# Altium PCB Analog.PcbDoc
Units mm, origin at the board's own origin, x right, y up, seen from the top; angles counter-clockwise.
Board outline 30 x 20 mm, 2 copper layers (Top Layer, Bottom Layer), stack 1.036 mm thick; 48 components, 25 nets, 118 pads, 51 vias.
Unrouted connection lines stored in the file: 1.
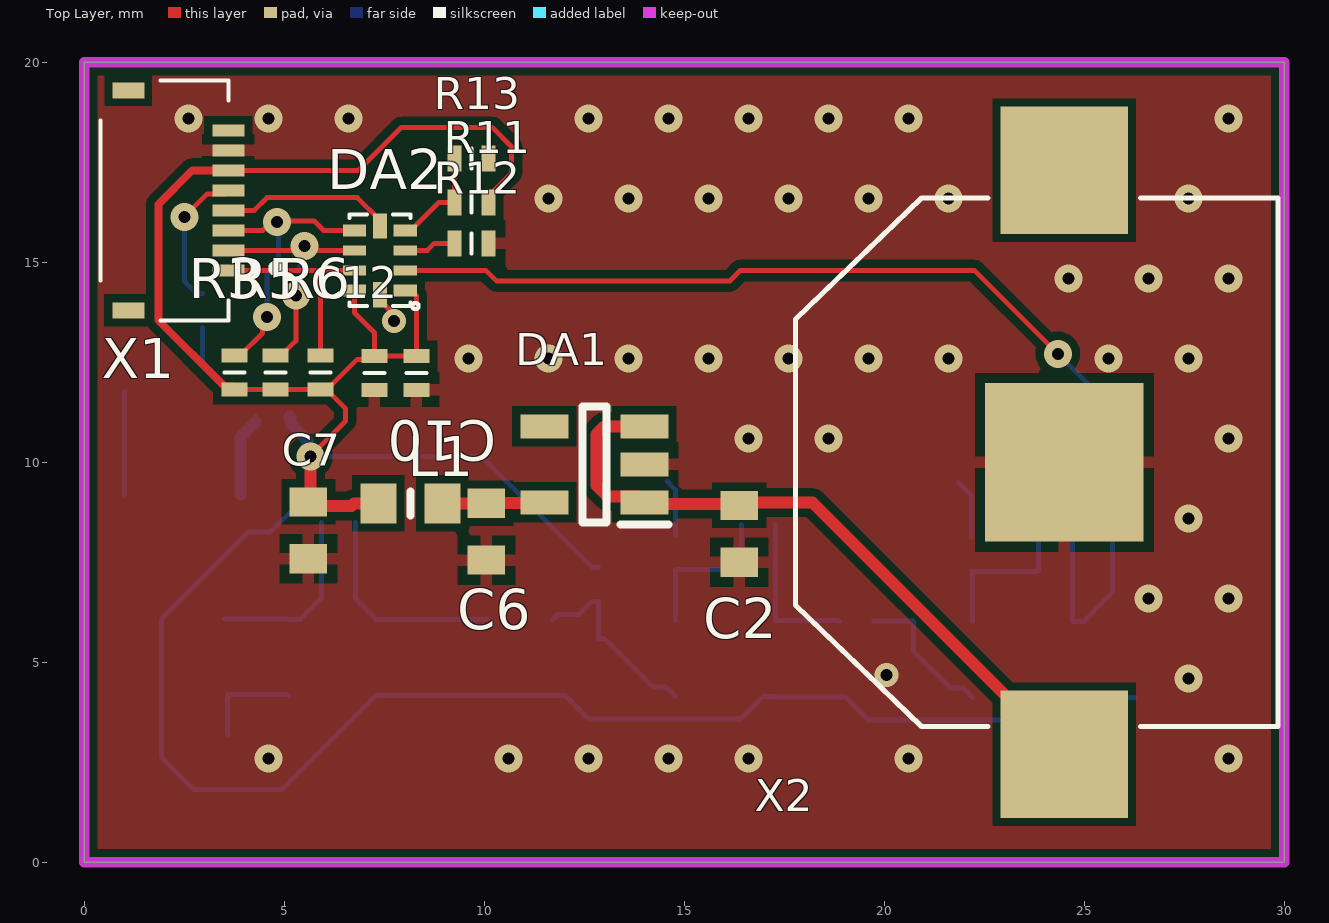
[diagram p0: Top Layer view]
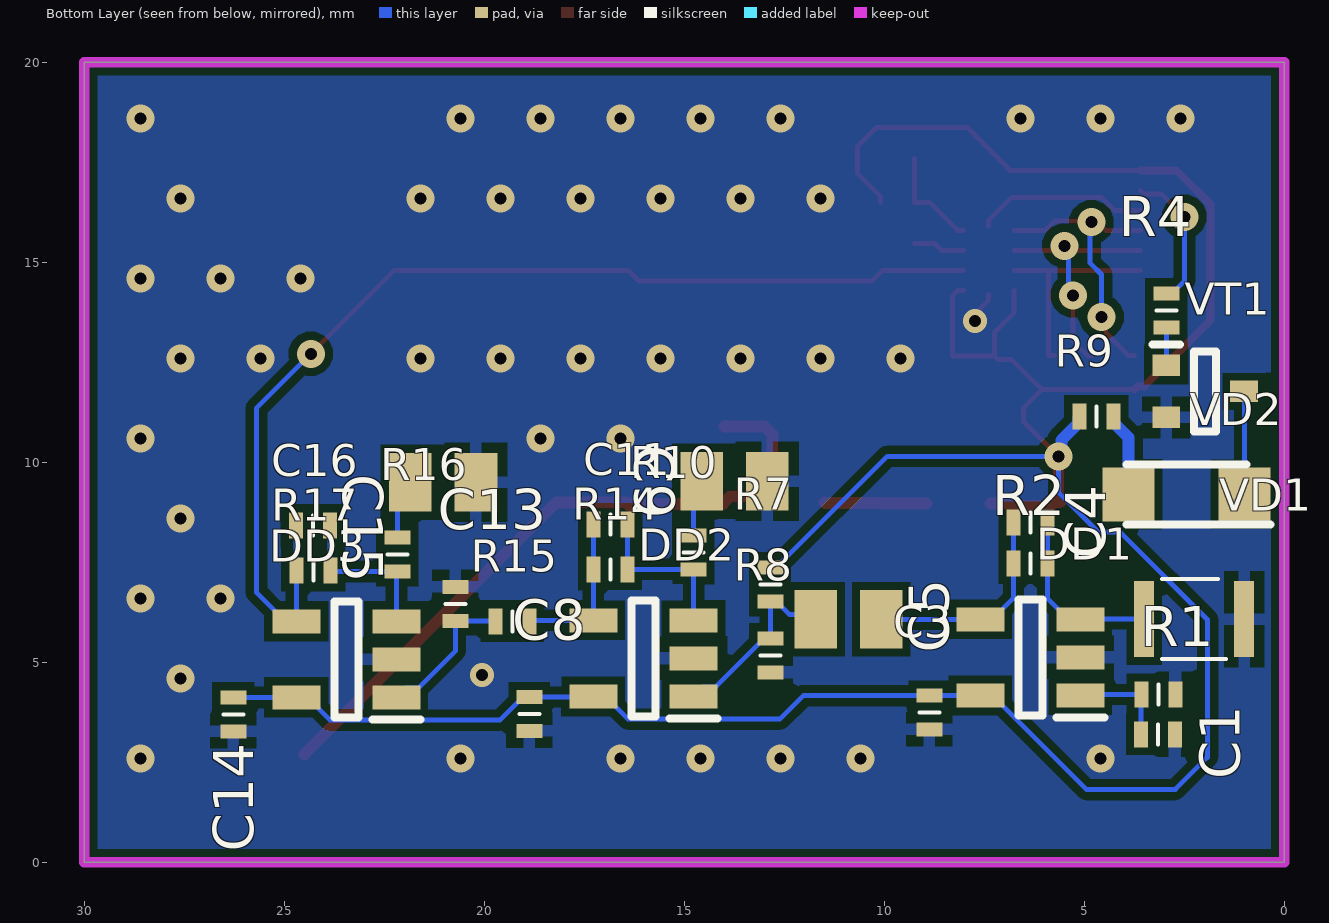
[diagram p1: Bottom Layer view, seen from below]
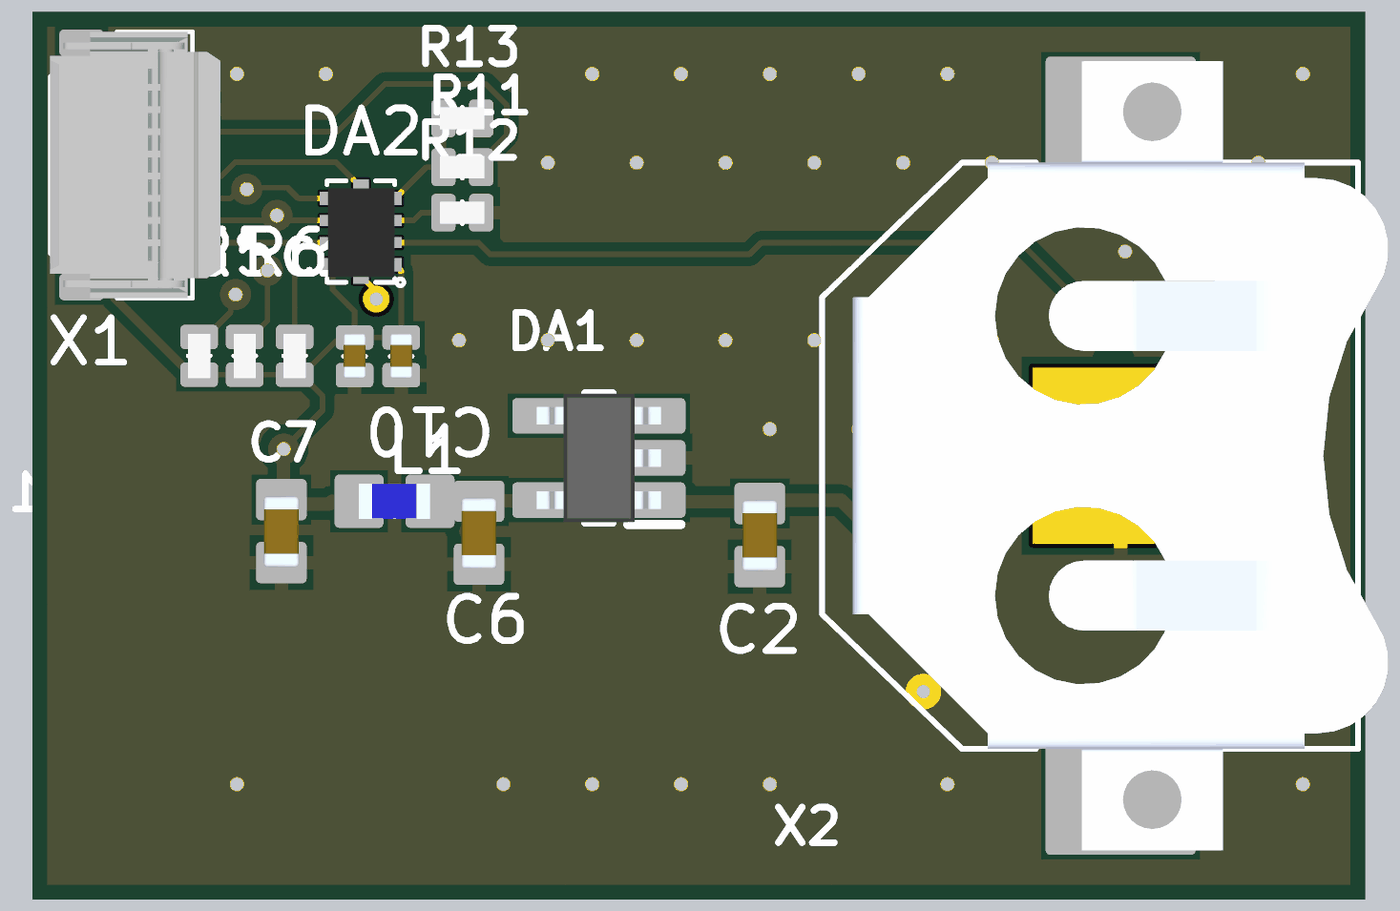
[diagram p2: 3D render of the assembled board from above, using the file's embedded part models]
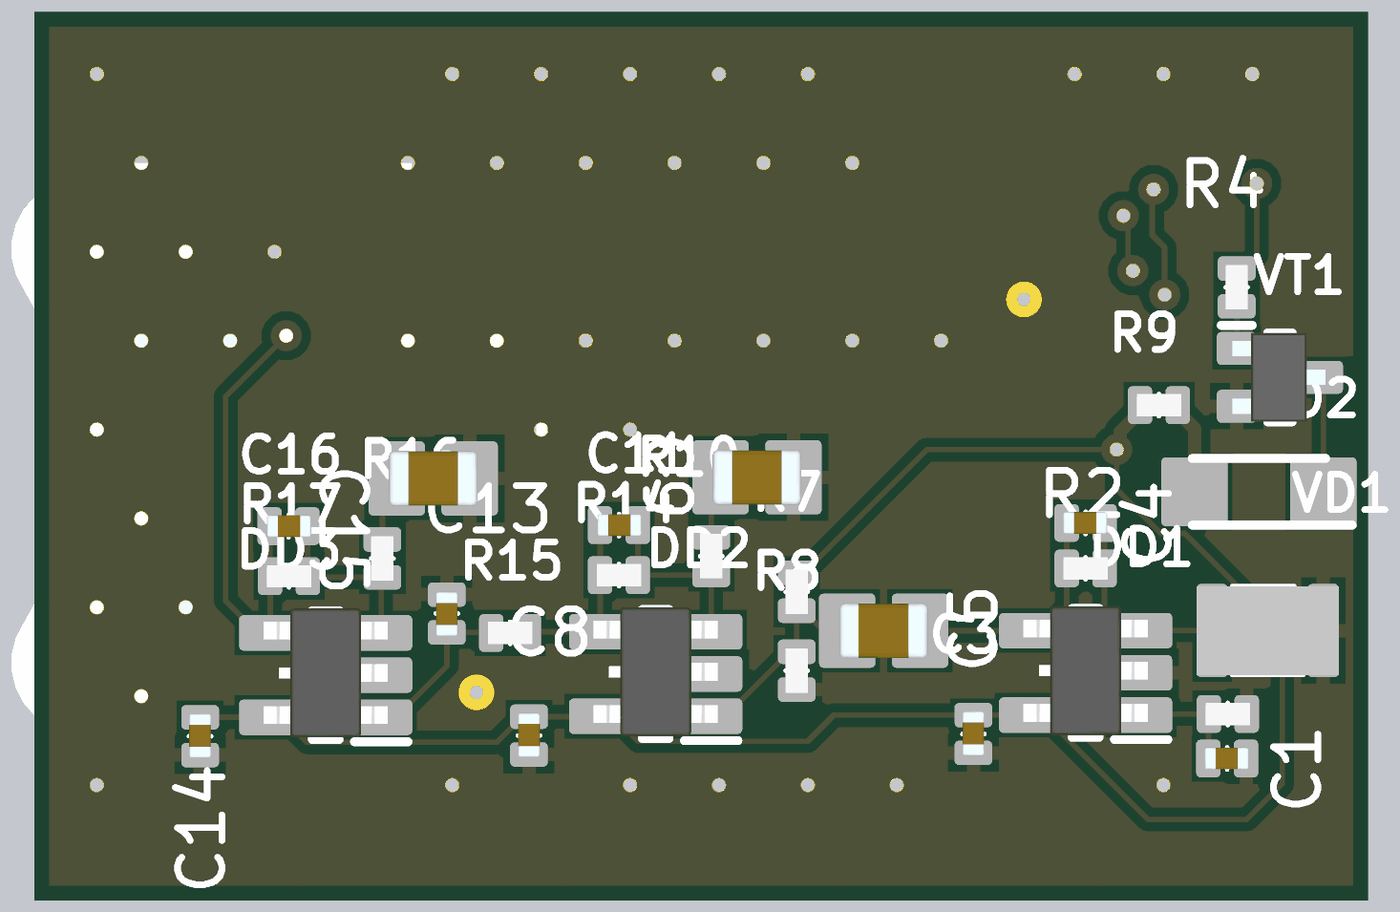
[diagram p3: 3D render of the assembled board from below, using the file's embedded part models]

## Layer stack, top to bottom
Top Solder: solder mask 0.0102, Solder Resist, Dk 3.5
Top Layer: signal copper 0.018
Dielectric 1: dielectric 1, FR-4, Dk 4.8
Bottom Layer: signal copper 0.018
Bottom Solder: solder mask 0.0102, Solder Resist, Dk 3.5

## Board outline
0,0 0,20 30,20 30,0

## Design rules (kind name [scope] priority, off if disabled: settings)
AcuteAngle [All] p1: minimum=8.00000000000000E+0001 checktracksonly=FALSE
BoardOutlineClearance [All] p1: gap=0.25 ignorepadtopadclearanceinfootprint=FALSE except(0: Arc-SplitContinuation Track-SplitContinuation SMDPad-SplitContinuation THPad-SplitContinuation Via-SplitContinuation Fill-SplitContinuation Poly-SplitContinuation Region-SplitContinuation Text-SplitContinuation)
Clearance Clearance_Keep-Out [All vs (OnLayer('Keep-Out Layer, Board'))] p1: gap=0.25 ignorepadtopadclearanceinfootprint=FALSE
Clearance [All] p2: gap=0.2 ignorepadtopadclearanceinfootprint=FALSE except(0.25: Arc-Hole Track-Hole SMDPad-Hole THPad-Hole Via-Hole Fill-Hole Poly-Hole Region-Hole Text-Hole)
ComponentClearance [All] p1: gap=0.5 collisioncheckmode=3 verticalgap=0.5 showdistances=TRUE
Height [All] p1: minheight=0 maxheight=25 prefheight=12.5
HoleSize HoleSizeVIA [IsVia] p1: absolutevalues=TRUE maxlimit=5.9 minlimit=0.3 maxpercent=80.000 minpercent=20.000
HoleSize HoleSizePAD [PadIsPlated] p2: absolutevalues=TRUE maxlimit=5.9 minlimit=0.5 maxpercent=80.000 minpercent=20.000
HoleSize HoleSizePAD_1 [IsPad] p3: absolutevalues=TRUE maxlimit=5.9 minlimit=0.5 maxpercent=80.000 minpercent=20.000
HoleToHoleClearance [All] p1: gap=0.25 allowstackedmicrovias=TRUE
MinimumAnnularRing MinimumAnnularVIA [All] p1: minimumring=0.15
MinimumAnnularRing MinimumAnnularPAD [All] p2: minimumring=0.2
MinimumSolderMaskSliver [All] p1: minsoldermaskwidth=0.15
PasteMaskExpansion [All] p1: expansion=0.1
PlaneClearance [All] p1: clearance=0.25
PlaneConnect [All] p1: planeconnectstyle=Relief reliefexpansion=0.3 reliefentries=4 reliefconductorwidth=0.3 reliefairgap=0.25
PolygonConnect [All] p1: thpad.connectstyle=Relief thpad.reliefconductorwidth=0.3 thpad.reliefentries=4 thpad.polygonreliefangle="90 Angle" thpad.airgapwidth=0.25 smdpad.connectstyle=Relief smdpad.reliefconductorwidth=0.3 smdpad.reliefentries=4 smdpad.polygonreliefangle="90 Angle" smdpad.airgapwidth=0.25 via.connectstyle=Direct via.reliefconductorwidth=0.3 via.reliefentries=4 via.polygonreliefangle="90 Angle" via.airgapwidth=0.25
RoutingCorners [All] p1: cornerstyle=45-Degree minsetback=2.5 maxsetback=2.5
RoutingVias [All] p1: holewidth=0.4 width=0.8 viastyle="Through Hole" minholewidth=0.3 minwidth=0.6 maxholewidth=0.5 maxwidth=1
SilkToSilkClearance [All] p1: silktosilkclearance=0.15
SilkToSolderMaskClearance SilkscreenOverComponentPads [IsPad] p1: minsilkscreentomaskgap=0.15 clearancetoexposedcopper=TRUE
SolderMaskExpansion [All] p1: expansion=0.1 istentingtop=FALSE
UnConnectedPin [All] p1:
Width [All] p1: maxlimit=1.5 minlimit=0.125 preferedwidth=0.3
19 further rules are at their usual default settings.

## Classes and differential pairs
component class Analog: C1 C2 C3 C4 C5 C6 C7 C8 C9 C10 C11 C12 C13 C14 C15 C16 DA1 DA2 DD1 DD2 DD3 L1 R1 R2 R3 R4 R5 R6 R7 R8 R9 R10 R11 R12 R13 R14 R15 R16 R17 VD1 VD2 VD4 VT1 XT1

## Components (designator, comment, footprint, x,y, rotation, side; value= is the part's Value field where it differs from the comment)
C1 "0,01мк" CAP0402 2.75,3.2 r0 bottom
C2 "1мк" CAP0603 16.373,7.503 r90 top
C3 "0,1мк" CAP0402 8.874,3.336 r90 bottom
C4 "10п" CAP0402 5.936,8.501 r0 bottom
C5 "3,3мк" CAP0805 10.075,6.075 r0 bottom
C6 "10мк" CAP0603 10.05,7.555 r90 top
C7 "10мк" CAP0603 5.601,7.591 r90 top
C8 "0,1мк" CAP0402 18.875,3.3 r90 bottom
C9 "3,3мк" CAP0805 14.565,9.525 r180 bottom
C10 "220н" CAP0402 8.3,11.825 r90 top
C11 "33н" CAP0402 17.264,8.449 r180 bottom
C12 "100н" CAP0402 7.25,11.825 r90 top
C13 "1мк" CAP0402 20.725,6.875 r270 bottom
C14 "0,1мк" CAP0402 26.274,3.286 r90 bottom
C15 "3,3мк" CAP0805 21.85,9.5 r180 bottom
C16 "1н" CAP0402 24.7,8.425 r180 bottom
DA1 "TPS7A0218PDBVR" TPS7A02 14,9 r180 top
DA2 "ADC" ADS7142IRUGT 8.025,14.3 r90 top
DD1 "operational amplifier_2" OPA333 5.1,4.175 r0 bottom
DD2 "operational amplifier_1" OPA333 14.775,4.15 r0 bottom
DD3 "operational amplifier_1" OPA333 22.2,4.125 r0 bottom
L1 "10мк" MLZ1608M100WT000 8.95,8.975 r180 top
R1 "1M" RES0402 2.725,4.2 r0 bottom
R2 "1M" RES0402 5.925,7.475 r0 bottom
R3 "10к" RES0402 3.75,11.825 r90 top
R4 "10" RES0402 2.95,13.375 r90 bottom
R5 "10к" RES0402 4.775,11.825 r90 top
R6 "10к" RES0402 5.9,11.825 r90 top
R7 "510к" RES0402 12.85,6.525 r90 bottom
R8 "510к" RES0402 12.85,4.75 r90 bottom
R9 "10" RES0402 4.275,11.15 r0 bottom
R10 "100к" RES0402 14.775,7.325 r90 bottom
R11 "0" RES0402 10.1,16.5 r180 top
R12 "0" RES0402 9.25,15.475 r0 top
R13 "DNP" RES0402 9.25,17.6 r0 top value=0
R14 "1М" RES0402 17.275,7.325 r180 bottom
R15 "10к" RES0402 19.725,6.025 r180 bottom
R16 "100к" RES0402 22.175,7.275 r90 bottom
R17 "10М" RES0402 24.7,7.3 r180 bottom
VD1 "3Л341БаА0.339.189ТУ" SFH2703 1.025,6.075 r0 bottom
VD2 "15412094A9000аА0.339.189ТУ" LED1206 0.988,9.213 r0 bottom
VT1 "RU1J002YNTCL" MOSFET 2.95,12.425 r180 bottom
X1 "FFC-82328702-8" FFC8 1.074,19.3 r270 top (schematic designator XT1)
X2 "battery" Battery 24.485,10.034 r270 top
ZBOAS139391748 "Comment" "BOASVIEWdrill:Таблица отверстий:0:0:0:0" 10,2305 r0 top
ZBOAS174894661 "Слой 1" "BOASVIEWlayer:Top Layer:5:1:1:1" 19,2379 r0 top (schematic designator fewf)
ZBOAS863798598 "Comment" "BOASVIEWside:Вид платы слева:5:0:0:0" 194,2479 r0 top
ZBOAS989794661 "Слой 2" "BOASVIEWlayer:Bottom Layer:5:-2:32:1" 226,2379 r180 top (schematic designator fewf)

## Footprints (in the part's own frame and the unit in brackets; to place one, negate y for a bottom-side part, rotate by r counter-clockwise, add the part's x,y. Pads: shape width x height; smd on the part's side, far side on the other; paste and mask are expansions set on the pad)
ADS7142IRUGT [mm]
  rect 0.3x0.58 smd paste+0 mask+0.051: 1(0,0) 4(1.5,0) 6(1.5,1.27) 9(0,1.27)
  rect 0.25x0.58 smd paste+0 mask+0.051: 2(0.5,0) 3(1,0) 7(1,1.27) 8(0.5,1.27)
  rect 0.63x0.35 smd paste+0 mask+0.051: 5(1.61,0.635) 10(-0.11,0.635)
  silkscreen extent -0.47,-0.33 1.89,1.4, body extent -0.28,-0.13 1.73,1.38, height 0.4
Battery [mm]
  rect 3.96x3.96 smd paste-3: Neg(0.034,0.015)
  rect 3.18x3.18 smd: Pos(7.334,0.015) Pos2(-7.266,0.015)
  silkscreen extent -6.57,-6.71 6.64,5.36, body extent -8.86,-6.02 8.92,6.04, height 5.97
"BOASVIEWdrill:Таблица отверстий:0:0:0:0" [mm]
"BOASVIEWlayer:Bottom Layer:5:-2:32:1" [mm]
"BOASVIEWlayer:Top Layer:5:1:1:1" [mm]
"BOASVIEWside:Вид платы слева:5:0:0:0" [mm]
CAP0402 [mm]
  rect 0.35x0.65 smd: 1(-0.011,0.001) 2(0.839,0.001)
  silkscreen extent 0.41,-0.25 0.41,0.25, body extent -0.07,-0.25 0.92,0.25, height 0.55
CAP0603 [mm]
  rect 0.73x0.94 smd: 1(0,0) 2(1.42,0)
  body extent -0.1,-0.4 1.5,0.4, height 0.9
CAP0805 [mm]
  rect 1.07x1.47 smd: 1(0,0) 2(1.64,0)
  body extent -0.18,-0.63 1.82,0.63, height 1.3
FFC8 [mm]
  rect 0.4x0.8 smd: 0(0,0.026) 0(5.5,0.026)
  rect 0.3x0.8 smd: 1(4.5,2.526) 2(4,2.526) 3(3.5,2.526) 4(3,2.526) 5(2.5,2.526) 6(2,2.526) 7(1.5,2.526) 8(1,2.526)
  silkscreen extent -0.25,-0.67 5.75,3.83, body extent -0.25,-0.68 5.75,3.15, height 1.11
LED1206 [mm]
  rect 1.3x1.35 smd: A(2.912,0.013) K(0.012,0.013)
  silkscreen extent -0.64,-0.74 2.96,0.76
MLZ1608M100WT000 [mm]
  rect 0.9x1 smd: 1(0,0) 2(1.6,0)
  silkscreen extent 0.8,-0.3 0.8,0.3, body extent 0,-0.4 1.6,0.4, height 0.95
MOSFET [mm]
  rect 0.695x0.54 smd: 1(0,0) 2(0,-1.3) 3(1.944,-0.65)
  silkscreen extent -0.35,-1.65 1.25,0.52, body extent -0.1,-1.65 2,0.35, height 1.05
OPA333 [mm]
  rect 1.2x0.6 smd: 1(0,0) 2(0,-0.95) 3(0,-1.9) 4(2.5,-1.9) 5(2.5,0)
  silkscreen extent -0.6,-2.4 1.55,0.55, body extent -0.15,-2.45 2.65,0.45, height 1.2
RES0402 [mm]
  rect 0.35x0.65 smd: 1(0,0) 2(0.85,0)
  silkscreen extent 0.43,-0.25 0.43,0.25, body extent -0.08,-0.25 0.92,0.25, height 0.35
SFH2703 [mm]
  rect 0.5x1.9 smd: 1(-0.022,-0.003) 2(2.478,-0.003)
  silkscreen extent 0.43,-1 2.03,1, body extent -0.37,-1 2.83,1, height 0.6
TPS7A02 [mm]
  rect 1.2x0.6 smd: 1(0,0) 2(0,-0.95) 3(0,-1.9) 4(2.5,-1.9) 5(2.5,0)
  silkscreen extent -0.6,-2.4 1.55,0.55, body extent -0.15,-2.4 2.65,0.5, height 1.45

## Part data
C1 C2 C3 C4 C5 C6 C7 C8 C9 C10 C11 C12 C13 C14 C15 C16: library part CapCer, "Керамический конденсатор", manufacture=ОЖО.460.107ТУ, Name="Керамический конденсатор", Units=Ф
  C1: name_main=GRM155R71C103KA01D
  C2 C13: name_main=CC0603KRX7R7BB105, nameSuf=-3
  C3 C8 C14: name_main=CC0603KRX7R7BB104, nameSuf=-3
  C4: name_main=CL10C100JB8NNNC
  C5 C9 C15: name_main=GRM21BR60J335K
  C6 C7: name_main=GRM188R61E106M
  C10: name_main=CL10B224KA8NNNC
  C11: name_main=CC0603KRX7R7BB333, nameSuf=-3
  C12: name_main=GRM188R71C104KA01D
  C16: name_main=GRM188R61C105K
DA1: library part LDO, Name=Микросхема, name_main=TPS7A0218PDBVR
DD1 DD2 DD3: "Операционный усилитель", main_name=OPA333AIDBVR
L1: library part Ind, "Катушка индуктивности", Name="Катушка индуктивности", name_main=MLZ1608M100WT000, Units=Гн
R1 R14: library part Res, "Резистор", Manufacturer=АЛЯР.434110.005ТУ, Tolerance=1%, Name=Резистор, name_main=RC0603FR-071ML
R2 R7 R8 R10 R16 R17: library part Res, "Резистор", Manufacturer=АЛЯР.434110.005ТУ, Name=Резистор
  R2: name_main=RC0603FR-071ML
  R7 R8: name_main=RC0603FR-07510KL
  R10 R16: name_main=RC0603FR-07100KL
  R17: name_main=RC0603FR-0710ML
R3 R4 R5 R6 R9 R11 R12 R13 R15: library part Res, "Резистор", Manufacturer=АЛЯР.434110.005ТУ, Tolerance=5%, Name=Резистор
  R3 R5 R6 R15: name_main=RC0603FR-0710KL
  R4 R9: name_main=RC0603JR-0710RL
  R11 R12: name_main=RC0603FR-070RL
  R13: name_main=Р1-12-0,1-
VD1: library part Photodiode, "Photodiode", manufacture=аА0.339.189ТУ, Name=Индикатор, name_main=3Л341Б
VD2: library part Led, "Излучатель", manufacture=аА0.339.189ТУ, Name=Индикатор, name_main=15412094A9000
VT1: "N-MOSFET DirectFET SQ"
X1: library part FFC8, manufacture=2328702-8, Name=Разъемы, name_main=FFC-8
DA2: main_name=ADS7142IRUGT

## Via types
v1: diameter 0.7, hole 0.3, Top Layer to Bottom Layer, tented both sides, 49 vias
v2: diameter 0.6, hole 0.3, Top Layer to Bottom Layer, 2 vias

## Nets (pads, with @x,y where several pads share a name; then routed paths per layer and width w, separated by ;. In a path a pad name is that pad's centre, name@x,y a point inside that pad or via, vN(x,y) a via of type N, cw(c..) or ccw(c..) an arc to the next point about the centre after c; other vN are vias at no path point)
1V8: C3.2 C7.2 C8.2 C10.2 C12.2 C14.2 DA2.1 DA2.9 DD1.5 DD2.5 DD3.5 L1.2 R3.1 R5.1 R6.1 R7.2 R9.2 R11.1 X1.6 | length 76.4
  Top Layer w0.125: X1.6 6.856,17.3 7.931,18.375 10.196,18.375 10.675,17.896 10.675,17.225 10.1,16.65 R11.1 ; R3.1 R5.1 R6.1 R6.1@6.05,11.825 ; v1(5.651,10.149) 6.525,11.023 6.525,11.35 R6.1@6.05,11.825 ; DA2.9 6.755,13.741 7.249,13.248 C12.2 ; DA2.1 8.165,14.3 8.299,14.166 C10.2 C12.2 ; R6.1@6.05,11.825 6.162,11.937 6.187,11.937 6.824,12.574 7.159,12.574 C12.2
  Top Layer w0.2: X1.6 2.7,17.3 1.849,16.449 1.849,13.552 3.501,11.9 3.675,11.9 R3.1 ; L1.2 L1.2@7.35,9.025
  Top Layer w0.3: v1(5.651,10.149) 5.651,9.062 C7.2 C7.2@5.735,9.011 ; C7.2@5.735,9.02 5.844,8.911 6.68,8.911 6.745,8.975 L1.2
  Bottom Layer w0.125: R7.2 12.7,7.375 9.926,10.149 v1(5.651,10.149) 5.651,9.255 4.659,8.262 4.116,8.262 1.925,6.071 1.925,2.625 2.725,1.825 4.95,1.825 7.3,4.175 DD1.5 C3.2 12.017,4.175 12.604,3.587 16.412,3.587 16.975,4.15 DD2.5 17.286,4.139 C8.2 19.026,4.139 19.603,3.562 23.862,3.562 24.163,3.863 24.163,3.888 24.4,4.125 DD3.5 C14.2
  Bottom Layer w0.3: R9.2 5.15,11.125 5.15,10.975 5.575,10.55 5.575,10.226 v1(5.651,10.149)
A\L\E\R\T\: DA2.6 R3.2 X1.3 | length 7.2
  Top Layer w0.125: X1.3 4.462,15.8 4.666,16.003 v1(4.821,16.003) 4.856,16.039 5.74,16.039 5.979,15.8 DA2.6 ; R3.2 3.9,12.675 4.459,13.234 4.459,13.484 4.569,13.594 v1(4.569,13.632)
  Bottom Layer w0.125: v1(4.569,13.632) 4.569,14.696 4.854,14.98 4.854,15.971 v1(4.821,16.003)
BUSY: DA2.5 X1.4 | length 4.3
  Top Layer w0.125: X1.4 4.252,16.3 4.567,16.616 6.824,16.616 7.39,16.05 DA2.5
GND: C1.1 C2.1 C3.1 C6.1 C7.1 C8.1 C9.2 C10.1 C12.1 C13.1 C14.1 C15.2 DA1.2 DA2.10 DD1.2 DD2.2 DD3.2 R1.1 R8.1 R12.2 R13.2 VD1.1 VT1.2 X1.7 X2.Neg | length 0.8
  Top Layer w0.125: DA2.10 7.39,14.05 7.646,13.795 7.646,13.619 v2(7.736,13.528)
  other v1: 4.6,2.6 10.6,2.6 12.6,2.6 14.6,2.6 16.6,2.6 20.6,2.6 28.6,2.6 27.6,4.6 26.6,6.6 28.6,6.6 27.6,8.6 16.6,10.6 18.6,10.6 28.6,10.6 9.6,12.6 11.6,12.6 13.6,12.6 15.6,12.6 17.6,12.6 19.6,12.6 21.6,12.6 25.6,12.6 27.6,12.6 24.6,14.6 26.6,14.6 28.6,14.6 11.6,16.6 13.6,16.6 15.6,16.6 17.6,16.6 19.6,16.6 21.6,16.6 27.6,16.6 2.6,18.6 4.6,18.6 6.6,18.6 12.6,18.6 14.6,18.6 16.6,18.6 18.6,18.6 20.6,18.6 28.6,18.6
  other v2: 20.057,4.686
LED: R4.2 X1.5 | length 3.6
  Top Layer w0.125: v1(2.5,16.139) 3.073,16.713 3.513,16.713 X1.5
  Bottom Layer w0.125: v1(2.5,16.139) 2.5,14.525 2.8,14.225 R4.2
NetC1_2: C1.2 DD1.1 R1.2 | length 2.5
  Bottom Layer w0.125: C1.2 3.582,3.206 3.582,4.193 R1.2 5.075,4.2 DD1.1
NetC2_2: C2.2 DA1.1 DA1.3 X2.Pos | length 17.1
  Top Layer w0.3: DA1.3 13,10.9 12.8,10.7 12.8,9.425 13.075,9.15 13.85,9.15 14.038,8.962 16.335,8.962 C2.2 16.45,9 18.2,9 X2.Pos
NetC4_1: C4.1 DD1.3 R2.1 VD1.2 | length 4.5
  Bottom Layer w0.125: VD1.2 5.097,6.078 DD1.3 5.4,6.075 5.925,6.6 C4.1
NetC4_2: C4.2 C5.1 DD1.4 R2.2 | length 5.4
  Bottom Layer w0.125: C4.2 R2.2 6.775,6.6 7.3,6.075 DD1.4 C5.1
NetC5_2: C5.2 DD2.1 R7.1 R8.2 | length 4.8
  Bottom Layer w0.125: C5.2 11.829,6.189 12.364,6.189 12.7,6.525 R7.1 R8.2 13,5.6 14.213,4.387 14.538,4.387 DD2.1
NetC6_2: C6.2 DA1.5 L1.1 | length 2.6
  Top Layer w0.3: L1.1 C6.2 10.062,8.988 11.488,8.988 DA1.5
NetC9_1: C9.1 R10.2 | length 1.4
  Bottom Layer w0.125: C9.1 14.775,9.315 R10.2
NetC11_1: C11.1 DD2.4 R14.1 R15.2 | length 4
  Bottom Layer w0.125: C11.1 R14.1 DD2.4 18.85,6.05 R15.2
NetC11_2: C11.2 DD2.3 R10.1 R14.2 | length 4
  Bottom Layer w0.125: DD2.3 R10.1 R14.2 C11.2
NetC13_2: C13.2 DD3.1 R15.1 | length 3.7
  Bottom Layer w0.125: R15.1 19.736,6.036 C13.2 20.724,5.28 21.641,4.362 21.963,4.362 DD3.1
NetC15_1: C15.1 R16.2 | length 1.5
  Bottom Layer w0.125: C15.1 22.175,9.175 R16.2
NetC16_1: C16.1 DA2.2 DD3.4 R17.1 | length 27.6
  Top Layer w0.125: DA2.2 10.037,14.8 10.299,14.537 16.143,14.537 16.406,14.8 22.25,14.8 v1(24.338,12.712)
  Bottom Layer w0.125: v1(24.338,12.712) 25.7,11.35 25.7,6.75 25.238,6.288 25.238,6.262 25,6.025 DD3.4 R17.1 24.706,7.306 24.706,8.421 C16.1
NetC16_2: C16.2 DD3.3 R16.1 R17.2 | length 4.1
  Bottom Layer w0.125: DD3.3 22.2,7.25 R16.1 23.825,7.275 R17.2 23.856,7.306 23.856,8.421 C16.2
NetDA2_3: DA2.3 R12.1 | length 1.3
  Top Layer w0.125: DA2.3 8.576,15.3 8.751,15.475 R12.1
NetDA2_4: DA2.4 R11.2 R13.1 | length 2.6
  Top Layer w0.125: DA2.4 8.165,15.8 8.865,16.5 R11.2 R13.1
NetR4_1: R4.1 VT1.1 | length 0.9
  Bottom Layer w0.125: VT1.1 R4.1
NetR9_1: R9.1 VD2.A | length 2.1
  Bottom Layer w0.125: R9.1@4.275,11 R9.1
  Bottom Layer w0.3: VD2.A 3.9,10.625 R9.1@4.275,11
NetVD2_K: VD2.K VT1.3 | length 2.6
  Bottom Layer w0.125: VD2.K 1,11.769 VT1.3
SCL: DA2.8 R6.2 X1.1 | length 5.4
  Top Layer w0.125: X1.1 5.9,14.8 ; R6.2@5.75,12.675 R6.2 5.9,14.8 ; DA2.8 5.9,14.8
SDA: DA2.7 R5.2 X1.2 | length 6.4
  Top Layer w0.125: X1.2 v1@5.475,15.3 ; R5.2 4.925,12.675 5.288,13.038 v1(5.288,14.175) ; v1(5.5,15.413) 5.5,15.325 v1@5.475,15.3 ; DA2.7 v1@5.475,15.3
  Bottom Layer w0.125: v1(5.288,14.175) 5.394,14.281 5.394,15.306 v1(5.5,15.413)
pads on no net: DA1.4 X1.0 X1.8 X2.Pos2

## Polygon pours and split planes (outlines as drawn)
GND on Bottom Layer "GND_L02_P001" (solid, remove dead copper, pour order 1): 0,0 0,20 30,20 30,0
GND on Top Layer "GND_L01_P000" (solid, remove dead copper, pour order 0): 0,0 0,20 30,20 30,0

## Keep-outs
Keep-Out Layer:
  the board outline again, w0.254

## Silkscreen, mask and mechanical layers (free items; w line width, h text height)
Mechanical 7:
  text "BOASFORMAT|А3|1|0|883070867|165354330|1000000000|5:1|" at -25.4,2514.6 h0
  text "DimV|0|-39370079|17480315|985984252|-4724409|-18503937|5||||js12|False|True|False|False" at 19,2479 h0
  text "DimH|-59055118|0|76535433|985984252|-31889764|3543307|5||||js12|False|True|False|False" at 169,2479 h0
  text "DimH|-1968504|0|88346457|985984252|2755905|3149606|5||||js12|False|True|False|False" at 199,2479 h0
  text "DimRoughness|0|0|-84015748|-954094488|1|||||0|0|False|2" at 194,2396 h0 r90
  text "DimRoughness|0|0|-90314961|-952519685|1|||||0|0|False|2" at 199.336,2395.97 h0 r270
  text "SET2|Superlayer=MechanicalLayer7|Wsuperlayer=MechanicalLayer8|Layergrid=MechanicalLayer9|Werase=MechanicalLayer11|Layermark=MechanicalLayer12|Layerstamp=MechanicalLayer13|Thinline=0,18|Basicline=0,6|Gridline=0,18|Boardline=0,6|Contourpolygonline=0,6|PcbGridStep=1|PcbGridNumbering=False|PcbGridCleareanceAtView=0|PcbGridNumberEach=l5|PcbGridLineEach=l2|PcbGridCountSecondaryStrip=20|PcbGridEnabledStrip=True|PcbGridHorizontal90=False|PcbGridWhiteAreaBeforeText=True|PcbSignalGridEnabled=True|PcbSignalShowBukva=True|RealSignalLayerNames=False|PcbGridEnabledBothSide=False|PcbPolarGridEnabled=False|PcbPolarGridAngleStep=10|PcbPolarGridRadialStep=10|PcbPolarGridCenterPcbGrid=False|SilkShowPad=True|SilkViewName=Слой маркировки|SilkShowHole=True|SilkShowAxis=True|SilkShowBukva=True|SilkShowGrid=False|SolderShowGrid=False|SolderViewName=Слой маски|SolderShowAxis=False|SolderShowBukva=False|MainViewShowGrid=False|MainViewMinDiameterHoles=2|MainViewUseShapesDrill=False|ShowBukvaOnSboky=True|ShowBukvaViews=True|Density=2,2|CustomHoleSizeFactor=1|TableName=Таблица 1|RazrezWidth=100|RealLayerNames=False|RazrezShowBukva=False|RazrezBukva=В-В|Sher=Rz 80|Asstoplayer=MechanicalLayer1|Asstoplayer2=None|Assbottomlayer=MechanicalLayer2|Assbottomlayer2=None|AssMinDiameterHoles=2|AssDim=False|AssMech=False|AssSilk=False|AssComponentSilk=False|AssFreeSilk=False|AssSmdPads=False|AssGridEnable=False|AssShowBukva=True|Mirror=Horisontal|PcbGridFontSize=5|PcbGridCenterZero=False|TTStampDistance=12|MainFontSize=5|PolyShtrihEnable=True|RegionShtrihEnable=False|PolyStep=2|PcbDrillDrawingGridEnabled=False|PcbDrillDrawingViewName=Слой сверловки|PcbDrillDrawingShowBukva=False|PcbDrillDrawingShowAxis=False|PcbSignalLayersUseDrill=False|PcbSignalLayersUseWhiteHoles=True|PcbSignalLayersUseShapesDrill=False|PcbSignalLayersShowAxis=False" at -25.4,-25.375 h0
  text "TT0008#" at -25.4,-25.4 h0
  text "TT0007#8. Остальные требования по ОСТ 4ГО.070.014." at -25.4,-25.4 h0
  text "TT0006#7. Переходные отверстия паяльной маской не закрывать." at -25.4,-25.4 h0
  text "TT0005#6. Финишное покрытие: 0-Ко.Гор.ПОС-61." at -25.4,-25.4 h0
  text "TT0004#5. Конфигурацию проводников выдержать по чертежу с отклонением 0,05 мм с учетом обеспечения необходимых зазоров в узких местах." at -25.4,-25.4 h0
  text "TT0003#4. Шаг координатной сетки 0,625 мм." at -25.4,-25.4 h0
  text "TT0002#3. Материал-заменитель: СФ-1-18Г-2 1кл. ГОСТ 10316-76" at -25.4,-25.4 h0
  text "TT0001#2. Плату изготовить кобминированным позитивным методом." at -25.4,-25.4 h0
  text "TT0000#1. *Размеры для справок" at -25.4,-25.4 h0
  text "STAMP|Разработал|Митр Д.В." at -25.4,-25.4 h0
  text "STAMP|Проверил|Глазков В.В." at -25.4,-25.4 h0
  text "STAMP|Tech|Т.контр." at -25.4,-25.4 h0
  text "STAMP|Normo|Н.контр." at -25.4,-25.4 h0
  text "STAMP|Check|Пров." at -25.4,-25.4 h0
  text "STAMP|Design|Разраб." at -25.4,-25.4 h0
  text "STAMP|Utv|Утв." at -25.4,-25.4 h0
  text "STAMP|Компания1|Группа СМ5-111 Кафедра СМ5" at -25.4,-25.4 h0
  text "STAMP|Наименование1|Плата печатная" at -25.4,-25.4 h0
  text "STAMP|Материал1|Материал стеклотекстолит СФ-1Н-18Г-2 2кл. ГОСТ 10316-78" at -25.4,-25.4 h0
  text "STAMP|Компания2|МГТУ им Н.Э.Баумана" at -25.4,-25.4 h0
  text "BOASVIADRILLTABLE:none,118110,51,H12" at -25.4,-25.4 h0
  text "2BOASDRILLTABLE:" at -25.4,-25.4 h0
Mechanical 8:
  region: 199.092,2486.908 200.785,2486.261 204.499,2485.77 204.5,2486.904 203.568,2486.905 204,2486.342 199.093,2486.997
  region: 199.092,2487.092 200.785,2487.739 204.499,2488.23 204.5,2487.096 203.568,2487.095 204,2487.658 199.093,2487.003
  region: 193.908,2487.092 192.215,2487.739 188.501,2488.23 188.5,2487.096 189.432,2487.095 189,2487.658 193.907,2487.003
  region: 193.908,2486.908 192.215,2486.261 188.501,2485.77 188.5,2486.904 189.432,2486.905 189,2486.342 193.907,2486.997
  region: 168.908,2488.092 167.215,2488.739 163.501,2489.23 163.5,2488.096 164.432,2488.095 164,2488.658 168.907,2488.003
  region: 168.908,2487.908 167.215,2487.261 163.501,2486.77 163.5,2487.904 164.432,2487.905 164,2487.342 168.907,2487.997
  region: 19.092,2487.908 20.785,2487.261 24.499,2486.77 24.5,2487.904 23.568,2487.905 24,2487.342 19.093,2487.997
  region: 19.092,2488.092 20.785,2488.739 24.499,2489.23 24.5,2488.096 23.568,2488.095 24,2488.658 19.093,2488.003
  region: 7.092,2379.092 7.739,2380.785 8.23,2384.499 7.096,2384.5 7.095,2383.568 7.658,2384 7.003,2379.093
  region: 6.908,2379.092 6.261,2380.785 5.77,2384.499 6.904,2384.5 6.905,2383.568 6.342,2384 6.997,2379.093
  region: 6.908,2478.908 6.261,2477.215 5.77,2473.501 6.904,2473.5 6.905,2474.432 6.342,2474 6.997,2478.907
  region: 7.092,2478.908 7.739,2477.215 8.23,2473.501 7.096,2473.5 7.095,2474.432 7.658,2474 7.003,2478.907
Mechanical 9:
  circle w0.18: c202.666,2395.97 r1.67
  circle w0.18: c190.67,2396 r1.67
  region: 199,2487 204,2487.658 203.5,2487 204,2486.342
  region: 194,2487 189,2486.342 189.5,2487 189,2487.658
  region: 169,2488 164,2487.342 164.5,2488 164,2488.658
  region: 19,2488 24,2488.658 23.5,2488 24,2487.342
  region: 7,2379 6.342,2384 7,2383.5 7.658,2384
  region: 7,2479 7.658,2474 7,2474.5 6.342,2474
  lines w0.18: 6,2379 19,2379 ; 6,2479 19,2479 19,2489 ; 7,2379 7,2479 ; 19,2488 169,2488 ; 169,2479 169,2489 ; 185.5,2400.91 194,2396 189,2393.11 ; 186,2487 222.33,2487 ; 194,2479 194,2488 ; 199,2479 199,2488 ; 204.336,2398.86 199.336,2395.97 207.836,2391.06
  text "30-0,1" at 84.196,2490.53 h7.68
  text "1*" at 204.88,2489.53 h7.68
  text "20-0,1" at 4.47,2419.04 h7.68 r90
Mechanical 13:
  lines w0.18: 204.6,2227.6 269.6,2227.6 ; 204.6,2232.6 269.6,2232.6 ; 204.6,2237.6 269.6,2237.6 ; 204.6,2242.6 269.6,2242.6 ; 204.6,2247.6 269.6,2247.6 ; 204.6,2262.6 269.6,2262.6 ; 204.6,2267.6 269.6,2267.6 ; 204.6,2272.6 269.6,2272.6 ; 344.56,2242.6 344.56,2257.6 ; 349.58,2242.6 349.58,2257.6 ; 366.3,2496.7 369.4,2491.3 375,2501.1 ; -25.4,2217.6 394.6,2217.6 394.6,2514.6 -25.4,2514.6 -25.4,2217.6
  lines w0.6: -17.4,2247.6 -5.4,2247.6 ; -17.4,2282.6 -5.4,2282.6 ; -17.4,2307.6 -5.4,2307.6 ; -17.4,2332.6 -5.4,2332.6 ; -17.4,2449.6 -5.4,2449.6 ; -12.4,2222.6 -12.4,2367.6 ; -12.4,2389.6 -12.4,2509.6 ; -5.4,2367.6 -17.4,2367.6 -17.4,2222.6 -5.4,2222.6 ; -5.4,2389.6 -17.4,2389.6 -17.4,2509.6 -5.4,2509.6 ; -5.4,2495.6 64.6,2495.6 64.6,2509.6 ; 204.6,2222.6 204.6,2277.6 389.6,2277.6 ; 204.6,2252.6 269.6,2252.6 ; 204.6,2257.6 269.6,2257.6 ; 211.6,2252.6 211.6,2277.6 ; 221.6,2222.6 221.6,2277.6 ; 244.6,2222.6 244.6,2277.6 ; 259.6,2222.6 259.6,2277.6 ; 269.6,2222.6 269.6,2277.6 389.6,2277.6 ; 269.6,2237.6 339.6,2237.6 389.6,2237.6 ; 269.6,2262.6 389.6,2262.6 ; 326.6,2498.6 331.6,2489.6 339.2,2503.6 ; 339.3,2503.6 381.6,2503.6 ; 339.6,2222.6 339.6,2262.6 ; 339.6,2242.6 389.6,2242.6 ; 339.6,2257.6 354.6,2257.6 389.6,2257.6 ; 354.6,2242.6 354.6,2262.6 ; 360.17,2237.6 360.17,2242.6 ; 371.6,2242.6 371.6,2262.6 ; 389.6,2285.6 389.6,2277.6 ; -5.4,2222.6 389.6,2222.6 389.6,2509.6 -5.4,2509.6 ; -5.4,2222.6 -5.4,2509.6
  text "Rz 80" at 339.3,2491.3 h10.75
  text "(" at 362.6,2491.3 h10.75
  text ")" at 373.6,2491.3 h10.75
  text "Перв. примен." at -13.362,2469.579 h5.38 r90
  text "Справ. №" at -13.362,2412.104 h5.38 r90
  text "Подп. и дата" at -13.362,2340.171 h5.38 r90
  text "Инв. № дубл." at -13.362,2310.686 h5.38 r90
  text "1. *Размеры для справок / 2. Плату изготовить кобминированным позитивным методом. / 3. Материал-заменитель: СФ-1-18Г-2 1кл. ГОСТ 10316-76 / 4. Шаг координатной сетки 0,625 мм. / 5. Конфигурацию проводников выдержать по чертежу с отклонением 0,05 мм с учетом обеспечения необходимых зазоров в узких местах. / 6. Финишное покрытие: 0-Ко.Гор.ПОС-61. / 7. Переходные отверстия паяльной маской не закрывать. / 8. Остальные требования по ОСТ 4ГО.070.014." at 209.6,2297.6 h7.68
  text "Взам. инв. №" at -13.362,2285.708 h5.38 r90
  text "Лит." at 343.794,2258.562 h5.38
  text "Масса" at 358.516,2258.562 h5.38
  text "Масштаб" at 373.436,2258.562 h5.38
  text "Подп. и дата" at -13.362,2255.671 h5.38 r90
  text "Изм." at 205.169,2253.562 h5.38
  text "Лист" at 212.458,2253.562 h5.38
  text "№ докум." at 226.6,2253.562 h5.38
  text "Подп." at 248.373,2253.562 h5.38
  text "Дата" at 260.393,2253.562 h5.38
  text "Плата печатная" at 286.201,2251.403 h7.68
  text "Разраб." at 205.133,2248.371 h5.38
  text "Митр Д.В." at 222.28,2248.371 h5.38
  text "5:1" at 377.543,2247.903 h7.68
  text "Пров." at 205.133,2243.371 h5.38
  text "Глазков В.В." at 222.28,2243.371 h5.38
  text "Т.контр." at 205.133,2238.371 h5.38
  text "Лист" at 341.042,2238.371 h5.38
  text "Листов" at 362.085,2238.371 h5.38
  text "1" at 382,2238.371 h5.38
  text "Группа СМ5-111 Кафедра СМ5" at 340.1,2231.437 h5.81
  text "Материал стеклотекстолит СФ-1Н-18Г-2 2кл. ГОСТ 10316-78" at 270.088,2229.027 h3.75
  text "Н.контр." at 205.133,2228.371 h5.38
  text "Инв. № подл." at -13.362,2225.686 h5.38 r90
  text "МГТУ им Н.Э.Баумана" at 341.455,2224.903 h7.68
  text "Утв." at 205.133,2223.371 h5.38
  text "Копировал" at 280.133,2218.371 h5.38
  text "Формат А3" at 360.877,2218.371 h5.38

## Text inside footprints (layer, text, board x,y; h text height)
ZBOAS139391748: Mechanical 12 "Таблица 1" at 10,2306.5 h7.68; Mechanical 12 "Обозначение" at 15.144,2299.053 h7.68; Mechanical 12 "отв." at 24.663,2291.553 h7.68; Mechanical 12 "Диаметр отв.," at 51.533,2299.053 h7.68; Mechanical 12 "мм" at 63.986,2291.553 h7.68; Mechanical 12 "Диаметр конт." at 87.5,2299.053 h7.68; Mechanical 12 "площадки, мм" at 88.776,2291.553 h7.68; Mechanical 12 "Наличие" at 129.965,2299.053 h7.68; Mechanical 12 "металлизации" at 123.047,2291.553 h7.68; Mechanical 12 "Кол." at 162.395,2299.053 h7.68; Mechanical 12 "отв." at 162.175,2291.553 h7.68; Mechanical 12 "49" at 163.572,2282.303 h7.68; Mechanical 12 "0,3" at 63.776,2282.303 h7.68; Mechanical 12 "+0,1" at 72.25,2286.212 h5.38; Mechanical 12 "Да" at 135.983,2282.303 h7.68; Mechanical 12 "0,7" at 100.18,2282.303 h7.68
ZBOAS174894661: Mechanical 7 "0" at 11.851,2376.803 h7.68; Mechanical 7 "5" at 11.708,2401.803 h7.68; Mechanical 7 "10" at 10.685,2426.803 h7.68; Mechanical 7 "15" at 10.77,2451.803 h7.68; Mechanical 7 "20" at 8.801,2476.803 h7.68; Mechanical 7 "0" at 17.425,2367.603 h7.68; Mechanical 7 "5" at 42.354,2367.603 h7.68; Mechanical 7 "10" at 66.842,2367.603 h7.68; Mechanical 7 "15" at 91.885,2367.603 h7.68; Mechanical 7 "20" at 115.9,2367.603 h7.68; Mechanical 7 "25" at 140.943,2367.603 h7.68; Mechanical 7 "30" at 166.057,2367.603 h7.68
ZBOAS989794661: Mechanical 7 "0" at 380,2376.803 h7.68; Mechanical 7 "5" at 380,2401.803 h7.68; Mechanical 7 "10" at 380,2426.803 h7.68; Mechanical 7 "15" at 380,2451.803 h7.68; Mechanical 7 "20" at 380,2476.803 h7.68; Mechanical 7 "0" at 374.425,2367.603 h7.68; Mechanical 7 "5" at 349.354,2367.603 h7.68; Mechanical 7 "10" at 323.842,2367.603 h7.68; Mechanical 7 "15" at 298.885,2367.603 h7.68; Mechanical 7 "20" at 272.9,2367.603 h7.68; Mechanical 7 "25" at 247.943,2367.603 h7.68; Mechanical 7 "30" at 223.057,2367.603 h7.68